# Allegro board Modulo-Rev_03.brd
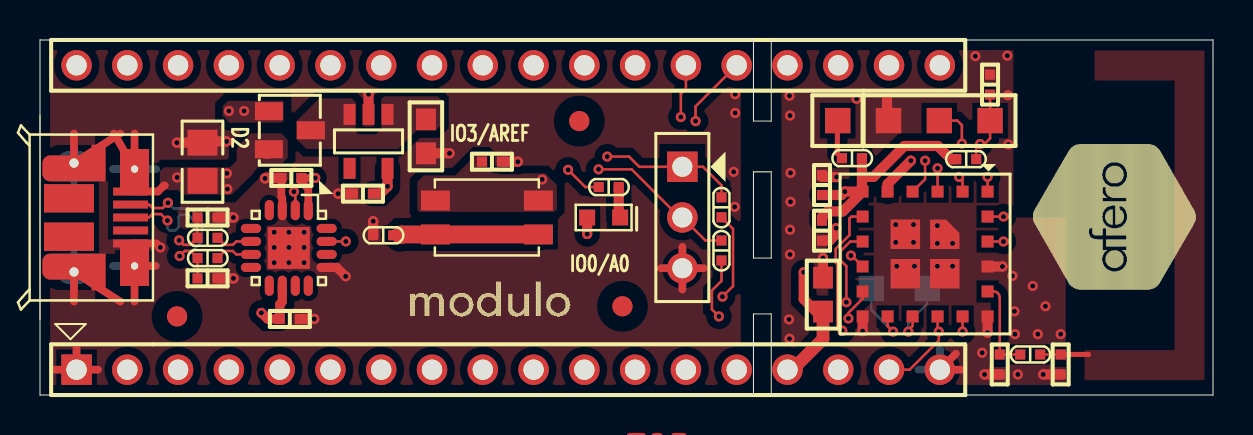
[diagram p0: board, top side]
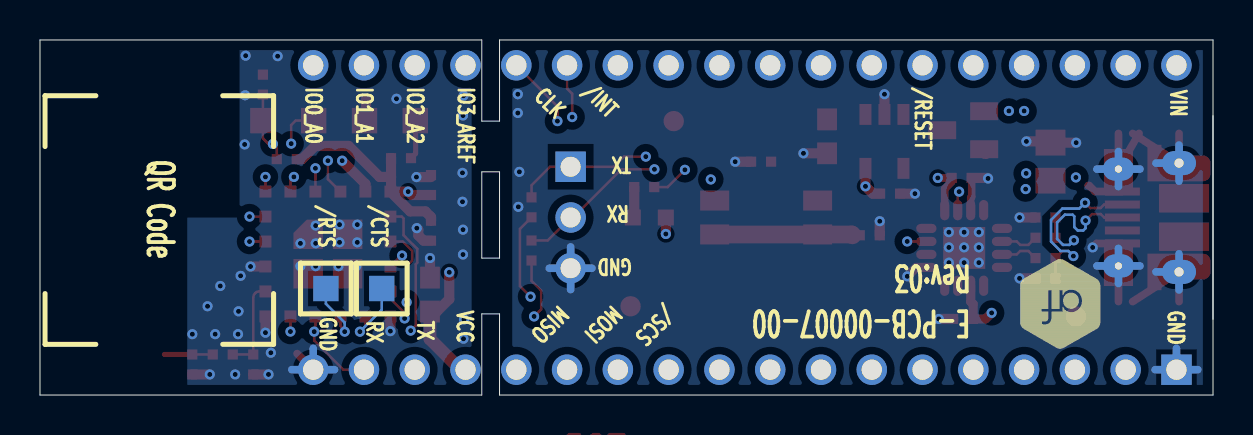
[diagram p1: board, bottom side, seen from below]

Outline 58.67 x 17.78 mm; copper layers: TOP, GND_IN2, PWR_IN3, BOTTOM. Coordinates in mm from the lower left corner of the outline.
Outline path: 0,17.78 0,0 35.69,0 35.69,4.06 36.58,4.06 36.58,0 58.67,0 58.67,17.78 36.58,17.78 36.58,13.72 35.69,13.72 35.69,17.78 0,17.78 ; 35.69,11.18 35.69,6.86 36.58,6.86 36.58,11.18 35.69,11.18

## Design rules (mm)
net group DIFFPAIR0: nets USB_DM USB_DP
net group DIFFPAIR1: nets USB_DM_JACK USB_DP_JACK
nets with their own width: min track width 0.508; nets GND VCC_SIP

## Placement (name value [footprint] x y rotation side)
C1  1uF  [CAP0402]  22.61 11.68 0 top
C2  0.1uF  [CAP0402]  12.57 10.87 180 top
C3  0.1uF  [CAP0402]  12.5 3.81 0 top
C4  4.7uF  [CAP0805]  8.13 11.68 90 top
C5  1uF  [CAP0402]  16.15 10.08 180 top
C6  4.7uF,10V  [CAP0603]  19.3 12.95 270 top
C7  47pF  [CAP0402]  8.38 5.84 0 top
C8  47pF  [CAP0402]  8.38 8.89 0 top
C9  12pF  [CAP0402]  39.12 10.52 90 top
C10  0.1uF  [CAP0402]  39.12 8.23 270 top
C11  22uF  [CAP0603]  39.17 5.03 90 top
C12  1nF  [CAP0402]  47.52 15.54 90 top
D1  615nm Orange  [LED-0603]  28.19 8.89 0 top
D2  BAV70  [SOT23-BAV70]  12.5 13.26 270 top
J1  HEADER 18  [0P1INCH-HDRX18]  1.83 1.27 0 top
J2  HEADER 18  [0P1INCH-HDRX18#2]  45.01 16.51 180 top
J3  USB Micro-B  [FCI-10103594-0001LF]  4.53 8.89 270 top
J4  1/10" HDR  [TE-87224-3]  32.13 11.43 90 top
J6  4PADS  [4X0P1SPACE50MILSQUARE]  39.9 13.74 0 top
L2  4.7nH  [IND0402]  48.01 1.53 90 top
L3  4.7nH  [IND0402]  51.05 1.53 90 top
NOREF  -  [unnamed]  6.86 3.94 0 top
NOREF#2  -  [#2]  59.18 0 90 top
NOREF#3  -  [#2]  36.58 13.72 90 top
NOREF#4  -  [#2]  35.69 6.86 90 top
NOREF#5  -  [#2]  36.58 0 90 top
NOREF#6  -  [#2]  0 17.78 0 top
NOREF#7  -  [unnamed]  29.13 4.45 0 top
NOREF#8  -  [#2]  35.69 6.86 0 top
NOREF#9  -  [unnamed]  26.97 13.72 0 top
R1  300  [RES0402]  28.45 10.41 180 top
R2  100  [RES0402]  17.17 8 180 top
R3  1K  [RES0402]  34.09 9.4 90 top
R4  1K  [RES0402]  34.09 7.24 90 top
R5  27  [RES0402]  8.38 6.86 180 top
R6  27  [RES0402]  8.38 7.87 180 top
R8  0  [RES0402]  49.53 2.03 180 top
R9  10K  [RES0402]  46.33 11.81 0 top
R10  0  [RES0402]  40.61 11.86 180 top
SW1  EVQ-P2202M  [PANA-EVQ-P2202M]  22.35 8.89 0 top
TP1  Tiny TP  [TESTPAD50MILSQ]  41.58 5.33 180 bottom
TP2  Tiny TP  [TESTPAD50MILSQ]  44.37 5.33 180 bottom
U1  FT230X  [FTDI_FT230X]  12.45 7.37 270 top
U2  3.3V,300mA  [TI-TLV70233DBVR]  16.43 12.7 180 top
U3  HACHI  [KIBAN-SIP]  44.27 7.06 180 top

## Library data of the parts
C1-C12 = CAP NP
D1 = LED2P
D2 = BAV70
J1 J2 = HEADER 18
J3 = USB-B-MICRO
J4 = HDR-1x3
J6 = 4PADS
L2 L3 = IND
R1-R6 R9 = RESISTOR
R8 R10 = RES
SW1 = SW PUSHBUTTON 4
TP1 TP2 = Tiny TP
U1 = FTDI FT230X: User Part Number: E-ICS-00053-00; Tolerance: TOLERANCE
U2 = TI-TLV70233DBVR
U3 = HACHI-CUSTOMER

## Footprints (pads in the part's own frame, mm; a bottom-side part is the same pattern mirrored in y, then rotated)
0P1INCH-HDRX18
  rect 1.524x1.524 hole 1.016: 1(0,0)
  round 1.524 hole 1.016: 2(2.54,0) 3(5.08,0) 4(7.62,0) 5(10.16,0) 6(12.7,0) 7(15.24,0) 8(17.78,0) 9(20.32,0) 10(22.86,0) 11(25.4,0) 12(27.94,0) 13(30.48,0) 14(33.02,0) 15(35.56,0) 16(38.1,0) 17(40.64,0) 18(43.18,0)
0P1INCH-HDRX18#2
  round 1.524 hole 1.016: 1(0,0) 2(2.54,0) 3(5.08,0) 4(7.62,0) 5(10.16,0) 6(12.7,0) 7(15.24,0) 8(17.78,0) 9(20.32,0) 10(22.86,0) 11(25.4,0) 12(27.94,0) 13(30.48,0) 14(33.02,0) 15(35.56,0) 16(38.1,0) 17(40.64,0) 18(43.18,0)
4X0P1SPACE50MILSQUARE
  rect 1.27x1.27 smd: 1(0,0) 2(2.54,0) 3(5.08,0) 4(7.62,0)
CAP0402
  rect 0.508x0.508 smd: 1(-0.5,0) 2(0.5,0)
CAP0603
  rect 1.092x0.991 smd: 1(-0.85,0) 2(0.85,0)
CAP0805
  rect 1.295x1.499 smd: 1(-0.953,0) 2(0.953,0)
FCI-10103594-0001LF
  rect 1.425x2.5 smd: (-0.962,-3.084) (0.962,-3.084)
  rect 0.4x1.75 smd: 1(-1.3,-0.001) 2(-0.65,-0.001) 3(0,-0.002) 4(0.65,0) 5(1.3,-0.004)
  custom 2.008x1.454 hole 1.05x0.65: 6(-2.425,0.196) 7(2.425,0.196)
  custom 1.832x3.162 hole 0.7x1.2: 8(-2.725,-2.834)
  custom 1.832x3.163 hole 0.7x1.2: 9(2.725,-2.834)
FTDI_FT230X
  oval 1.016x0.457 smd: 1(-1.892,0.975) 2(-1.892,0.325) 3(-1.892,-0.325) 4(-1.892,-0.975) 9(1.892,-0.975) 10(1.892,-0.325) 11(1.892,0.325) 12(1.892,0.975)
  oval 0.457x1.016 smd: 5(-0.975,-1.892) 6(-0.325,-1.892) 7(0.325,-1.892) 8(0.975,-1.892) 13(0.975,1.892) 14(0.325,1.892) 15(-0.325,1.892) 16(-0.975,1.892)
  rect 2.1x2.1 smd: 17(0,0)
IND0402
  rect 0.508x0.508 smd: 1(-0.5,0) 2(0.5,0)
KIBAN-SIP
  rect 0.6x0.6 smd: 1(-3.125,-3.125) 2(-1.875,-3.125) 3(-0.625,-3.125) 4(0.625,-3.125) 5(1.875,-3.125) 6(3.125,-3.125) 7(3.125,-1.875) 8(3.125,-0.625) 9(3.125,0.625) 10(3.125,1.875) 11(3.125,3.125) 12(1.875,3.125) 13(0.625,3.125) 14(-0.625,3.125) 15(-1.875,3.125) 16(-3.125,3.125) 17(-3.125,1.875) 18(-3.125,0.625) 19(-3.125,-0.625) 20(-3.125,-1.875)
  rect 1.475x1.475 smd: 21(-0.988,0.988) 22(0.988,0.988) 24(0.988,-0.988)
  custom 1.475x1.475 smd: 23(-0.988,-0.988)
LED-0603
  rect 0.8x0.8 smd: 1(-0.825,0) 2(0.825,0)
PANA-EVQ-P2202M
  rect 1.45x1 smd: 1(-2.575,-0.85) 2(-2.575,0.85) 3(2.575,-0.85) 4(2.575,0.85)
RES0402
  rect 0.508x0.508 smd: 1(-0.5,0) 2(0.5,0)
SOT23-BAV70
  rect 0.9x1.4 smd: 1(-0.95,-1.05) 2(0.95,-1.05) 3(0,1.05)
TE-87224-3
  rect 1.524x1.524 hole 1: 1(0,0)
  round 1.524 hole 1: 2(-2.54,0) 3(-5.08,0)
TESTPAD50MILSQ
  rect 1.27x1.27 smd: 1(0,0)
TI-TLV70233DBVR
  rect 0.6x1.05 smd: 1(-0.95,-1.35) 2(0,-1.35) 3(0.95,-1.35) 4(0.95,1.35) 5(-0.95,1.35)
unnamed
  round 1.016 smd: (0,0)

## Nets
GND: C1.2 C2.2 C3.2 C4.2 C5.2 C6.2 C7.2 C8.2 C9.2 C10.2 C11.2 C12.2 J1.1 J1.18 J3.5(GND) J3.6(SH1) J3.7(SH2) J3.8(SH3) J3.9(SH4) J4.3 J6.2 L2.1 L3.1 R2.2 U1.3(GND1) U1.13(GND2) U1.17(GNDPAD) U2.2(GND) U3.11(GND1) U3.16(GND2) U3.18(GND3) U3.21(GND4) U3.22(GND5) U3.23(GND6) U3.24(GND7)
VCC_SIP: C2.1 C5.1 C9.1 C10.1 C11.1 D1.1(A) J1.15 R9.1 R10.1(PIN1) U1.1(VCCIO) U2.5(OUT) U3.6(VCC)
VCC_USB: C3.1 C4.1 D2.2(A2) J3.1(VBUS) U1.10(VCC)
VIN: D2.1(A1) J2.18
ANT_TRACE: L3.2 R8.1(PIN1)
DBG_CLK: J6.3 U3.20(RES3)
HOST_INT_B: J2.6 U3.1(HOST_INT_B)
IO0_A0: J2.1 R1.2 U3.2(IO0/A0)
IO1_A1: J2.2 U3.3(IO1/A1)
IO2_A2: J2.3 U3.4(IO2/A2)
IO3_AREF: C1.1 J2.4 SW1.2 SW1.4 U3.5(IO3/AREF)
RESET_B: C12.1 J2.13 J6.4 R9.2 U3.19(RESET_B)
RF: L2.2 R8.2(PIN2) U3.17(RF ANT OUT)
RX_FTDI: J4.2 R4.2 U1.2(RXD)
SPI_MISO: J1.14 U3.7(SPI_MISO)
SPI_MOSI: J1.13 U3.10(SPI_MOSI)
SPI_SCLK: J2.5 U3.9(SPI_SCLK)
SPI_SCS: J1.12 U3.8(SPI_SCS)
TX_FTDI: J4.1 R3.2 U1.15(TXD)
UART_RX: J1.17 R3.1 U3.14(DBG UART RX)
UART_TX: J1.16 R4.1 U3.15(DBG UART TX)
USB_DM: R5.1 U1.7(USBDM)
USB_DM_JACK: C7.1 J3.2(D-) R5.2
USB_DP: R6.1 U1.6(USBDP)
USB_DP_JACK: C8.1 J3.3(D+) R6.2
N286188: D1.2(C) R1.1
N287525: R2.1 SW1.1 SW1.3
N288985: J6.1 R10.2(PIN2)
N298800: TP1.1 U3.12(RES1)
N298804: TP2.1 U3.13(RES2)
N308551: C6.1 D2.3(CC) U2.1(IN) U2.3(EN)

Pads without a net: J1 2 3 4 5 6 7 8 9 10 11; J2 7 8 9 10 11 12 14 15 16 17; J3 4; U1 4 5 8 9 11 12 14 16; U2 4

## Via types
v1: diameter 0.508, hole 0.254, TOP to BOTTOM, 109 vias

## Routing (per net, layer and track width the routed paths; a pad name or vN(x,y) marks a point on that pad's centre or on a via; arc(x,y) is an arc through that point)
GND: length 96.9
  TOP w0.381: 31.06,6.35 J4.3 ; J4.3 32.13,7.42 ; J4.3 32.13,5.28 ; J4.3 33.2,6.35 ; J3.5 5.82,7.59 v1(6.02,7.39) ; J1.1 1.83,2.34 ; J1.1 0.76,1.27 ; J1.1 2.9,1.27 ; 45.81,2.08 J1.18 46.08,1.27 ; C2.2 12.07,9.92 12.12,9.88 U1.3 ; 4.73,4.68 J3.7 ; J3.7 4.73,7.3 ; J3.7 5.76,6.47 ; 4.02,4.68 J3.9 1.7,4.68 ; 4.73,13.1 J3.6 3.7,13.1 ; 4.02,13.1 J3.8 1.7,13.1
  TOP w0.457: U1.13 14.84,6.39 v1(15.29,5.94)
  TOP w0.508: 42.37,14.83 42.37,14.3 42.44,14.22 J6.2 ; U2.2 v1(16.43,15.06) ; C7.2 v1(9.68,5.84) ; v1(39.83,8.36) 39.75,8.28 39.75,8 39.48,7.73 C10.2 ; v1(6.85,12.64) C4.2 8.19,12.7 v1(9.33,12.7) ; U3.11 41.15,3.2 v1(41.15,3.2) ; C3.2 v1(13.72,3.81) ; C1.2 v1(23.9,11.68) ; C6.2 v1(20.49,12.1) ; L2.1 v1(47.24,1.03) ; U3.18 v1(48.14,6.44) ; C5.2 v1(14.91,10.08) ; C2.2 11.28,10.87 v1(11.25,10.85) ; C8.2 v1(9.68,8.89) ; C11.2 v1(39.17,6.86) ; U3.16 v1(47.4,3.12) ; R2.2 v1(16.67,8.7) ; L3.1 v1(50.18,1.03) ; 39.12,10.91 v1(39.84,10.91)
  GND_IN2 w0.381: J1.1 1.83,2.34 ; J1.1 2.9,1.27 ; J1.1 0.76,1.27 ; 4.73,5.58 J3.7 ; J3.7 5.81,6.47 ; J3.7 3.65,6.47 ; J3.7 4.73,7.35 ; J3.6 5.81,11.31 ; J3.6 4.73,10.43 ; J3.6 4.73,12.2 ; J3.6 3.65,11.31 ; J3.9 1.7,7.07 ; J3.9 1.7,5.26 ; J3.9 2.86,6.17 ; J4.3 32.13,7.42 ; J4.3 33.2,6.35 ; J4.3 32.13,5.28 ; J4.3 31.06,6.35 ; J3.8 2.86,11.61 ; J3.8 1.7,10.71 ; J3.8 1.7,12.52 ; J1.18 45.01,2.34 ; J1.18 46.08,1.27 ; J1.18 43.94,1.27
  BOTTOM w0.381: 32.13,5.28 J4.3 ; J4.3 33.2,6.35 ; J4.3 31.06,6.35 ; J4.3 32.13,7.42 ; J3.7 5.81,6.47 ; J3.7 4.73,7.35 ; J3.7 3.65,6.47 ; J3.7 4.73,5.58 ; J3.8 1.7,12.52 ; J3.8 2.86,11.61 ; J3.8 1.7,10.71 ; 4.73,10.43 J3.6 ; J3.6 4.73,12.2 ; J3.6 5.81,11.31 ; J3.6 3.65,11.31 ; J3.9 2.86,6.17 ; J3.9 1.7,5.26 ; J3.9 1.7,7.07 ; J1.18 46.08,1.27 ; J1.18 45.01,2.34 ; J1.18 43.94,1.27 ; J1.1 1.83,2.34 ; J1.1 0.76,1.27 ; J1.1 2.9,1.27
  vias: v1(11.71,8.15) v1(11.71,7.39) v1(11.71,6.63) v1(12.45,8.15) v1(12.45,7.39) v1(12.45,6.63) v1(13.21,8.15) v1(13.21,7.39) v1(13.21,6.63) v1(34.7,11.18) v1(34.75,9.42) v1(34.77,15.06) v1(34.77,14.12) v1(37.49,14.99) v1(37.52,14) v1(37.54,11.13) v1(37.54,9.68) v1(37.52,8.28) v1(37.52,7.04) v1(37.47,3.78) v1(37.49,2.82) v1(40.84,14.83) v1(42.8,8.53) v1(42.8,7.65) v1(42.85,6.45) v1(43.69,8.53) v1(43.69,7.65) v1(43.74,6.45) v1(44.89,8.48) v1(44.89,7.59) v1(44.89,6.45) v1(45.65,7.59) v1(45.65,6.45) v1(46.79,16.97) v1(47.13,2.12) v1(48.39,16.99) v1(48.41,15.01) v1(48.44,12.55) v1(48.64,5.97) v1(48.74,4.19) v1(48.77,3.05) v1(48.91,1.03) v1(49.66,5.46) v1(49.91,3.05) v1(50.29,4.45) v1(51.05,3.05)
VCC_SIP: length 23.6
  TOP w0.381: U1.1 13.42,10.33 13.07,10.68 C2.1 v1(13.77,10.87)
  TOP w0.508: D1.1 v1(27.37,8.07) ; U3.6 41.11,10.22 41.11,10.92 ; U3.6 40.16,9.19 39.4,9.19 39.12,8.92 C10.1 ; U3.6 v1(40.26,10.19) 40.09,10.02 C9.1 ; v1(38.2,6.15) 38.2,4.8 38.82,4.18 C11.1 ; 41.11,10.92 R10.1 ; 41.11,10.92 41.69,10.92 43.23,12.47 44.91,12.47 45.57,11.81 R9.1 ; U2.5 v1(17.38,10.45) 17.02,10.08 C5.1
  TOP w0.635: J1.15 37.63,1.27 39.17,2.81 C11.1
VCC_USB: length 4.8
  TOP w0.381: 6.25,10.49 6.2,10.49 5.9,10.19 J3.1
  TOP w0.457: v1(11.07,4.11) 11.38,3.81 C3.1 12,4.55 12.12,4.68 U1.10
  TOP w0.762: 11.45,12.26 11.41,12.22 11.36,12.22 D2.2
  vias: v1(6.86,10.9) v1(9.35,11.1) v1(9.37,10.31)
VIN: length 2.1
  PWR_IN3 w0.381: 2.9,16.51 J2.18 1.83,15.44
  vias: v1(9.45,14.22) v1(10.21,14.22)
ANT_TRACE: length 1
  TOP w0.127: R8.1 L3.2
DBG_CLK: length 8.9
  TOP w0.127: v1(46.11,12.59) 46.11,13.52 45.89,13.74 J6.3 ; U3.20 v1(48.19,8.94)
  PWR_IN3 w0.127: v1(46.11,12.59) 46.6,13.08 47.24,13.08 48.29,12.04 48.29,9.52 48.19,9.43 v1(48.19,8.94)
HOST_INT_B: length 21.4
  TOP w0.127: v1(32.05,13.92) 32.05,15.09 32.31,15.34 J2.6 ; U3.1 v1(47.4,10.92)
  PWR_IN3 w0.127: v1(47.4,10.92) 46.66,10.19 43.54,10.19 41.3,12.42 34.01,12.42 33.25,13.18 33.25,14 33.02,14.22 32.36,14.22 v1(32.05,13.92)
IO0_A0: length 31.9
  TOP w0.127: U3.2 46.15,10.75 v1(45.97,10.92) ; R1.2 27.28,10.41 v1(26.42,11.28)
  PWR_IN3 w0.127: v1(26.42,11.28) 29.92,14.78 33.27,14.78 33.78,14.27 33.78,13.54 34.39,12.93 41.66,12.93 43.81,10.77 45.82,10.77 v1(45.97,10.92) 45.59,11.3 45.59,15.93 J2.1
IO1_A1: length 7.3
  TOP w0.127: U3.3 v1(44.9,11.35)
  PWR_IN3 w0.127: J2.2 44.9,14.08 v1(44.9,11.35)
IO2_A2: length 9
  TOP w0.127: v1(44.27,11.73) 44.27,10.81 U3.4
  PWR_IN3 w0.127: J2.3 40.96,16.51 44.27,13.2 v1(44.27,11.73)
IO3_AREF: length 28.1
  TOP w0.508: U3.5 42.4,10.57 v1(43.56,11.73)
  PWR_IN3 w0.381: J2.4 38.91,14.99 38.91,13.41 38.99,13.34 ; 38.99,13.34 38.96,13.31 34.62,13.31 34.16,13.77 34.16,14.48 33.38,15.27 29.59,15.27 v1(25.12,10.79) ; 38.99,13.34 41.96,13.34 v1(43.56,11.73)
Net_4: length 1.3
  TOP w0.254: 52.45,2.03 51.18,2.03
RESET_B: length 51.6
  TOP w0.127: R9.2 46.83,12.37 v1(47.03,12.57) 47.24,12.57 47.52,12.85 J6.4 C12.1 ; U3.19 v1(48.19,7.69)
  PWR_IN3 w0.127: J2.13 14.53,15.48 16.55,13.46 20.04,13.46 23.22,10.29 26.37,10.29 27.13,11.05 27.13,11.58 30.05,14.5 33.15,14.5 33.53,14.12 33.53,13.34 34.19,12.67 41.5,12.67 43.71,10.46 46.2,10.46 46.58,10.85 46.58,12.13 v1(47.03,12.57) 47.17,12.57 47.98,11.76 47.98,9.88 47.68,9.58 47.68,8.2 v1(48.19,7.69)
RF: length 4.7
  TOP w0.127: U3.17 47.73,5.19 arc(47.82,5.17) 47.89,5.12 47.92,5.09 arc(47.98,4.99) 48.01,4.88 L2.2 R8.2
RX_FTDI: length 27.5
  TOP w0.127: v1(27.94,11.3) 29.59,11.3 32,8.89 J4.2 33.28,7.74 R4.2 ; U1.2 12.77,10.11 v1(12.7,10.19)
  PWR_IN3 w0.127: v1(12.7,10.19) 12.7,11.58 13.06,11.94 18.95,11.94 21.44,9.45 26.67,9.45 27.94,10.72 v1(27.94,11.3)
SPI_MISO: length 15.3
  TOP w0.127: v1(40.13,3.23) 39.88,3.48 39.88,6.55 39.8,6.63 39.8,7.32 40.49,8 40.49,8.84 40.58,8.94 U3.7
  PWR_IN3 w0.127: J1.14 34.85,2.3 34.96,2.41 34.96,4 35.39,4.42 38.94,4.42 v1(40.13,3.23)
SPI_MOSI: length 12.1
  TOP w0.127: v1(40.44,3.84) 40.44,4.11 41.15,4.83 U3.10
  PWR_IN3 w0.127: v1(40.44,3.84) 39.94,3.84 39.1,4.67 35.28,4.67 34.71,4.1 34.71,3.16 33.54,2 33.04,2 J1.13
SPI_SCLK: length 20
  TOP w0.127: U3.9 40.65,6.93 40.61,6.93 v1(40.56,6.99) ; J2.5 32.79,14.45 v1(32.79,13.72)
  PWR_IN3 w0.127: v1(40.56,6.99) 41.06,6.99 41.86,7.79 41.86,11.35 41.05,12.17 33.85,12.17 32.79,13.22 v1(32.79,13.72)
SPI_SCS: length 16.6
  TOP w0.127: U3.8 40.53,7.69 40.06,7.21 40.06,6.73 40.34,6.46 v1(40.34,4.65)
  PWR_IN3 w0.127: v1(40.34,4.65) 39.81,4.65 39.54,4.93 35.18,4.93 34.46,4.21 34.46,3.54 33.26,2.35 30.85,2.35 J1.12
TX_FTDI: length 32.9
  TOP w0.127: U1.15 v1(15.3,7.69) ; R3.2 34.09,10.5 33.16,11.43 J4.1 29.97,11.43 29.46,11.94 v1(28.37,11.94)
  PWR_IN3 w0.127: v1(28.37,11.94) 27.88,11.94 27.48,11.54 27.48,10.92 26.29,9.73 21.74,9.73 19.25,12.22 12.7,12.22 11.99,11.51 11.99,9.53 12.34,9.17 13.82,9.17 v1(15.3,7.69)
UART_RX: length 20.8
  TOP w0.127: U3.14 44.9,3.24 v1(44.96,3.17) 44.96,2.73 43.5,1.27 J1.17 ; R3.1 34.67,8.32 34.67,5.46 v1(34.14,4.93)
  PWR_IN3 w0.127: v1(44.96,3.17) 44.61,3.53 44.6,3.53 42.53,5.59 40.01,5.59 39.85,5.44 34.65,5.44 v1(34.14,4.93)
UART_TX: length 21.8
  TOP w0.127: U3.15 v1(46.15,3.18) ; R4.1 34.09,5.71 33.61,5.24 33.61,4.29 v1(33.96,3.94)
  PWR_IN3 w0.127: v1(33.96,3.94) 33.96,4.07 35.07,5.18 39.98,5.18 40.13,5.33 41.07,5.33 41.83,4.57 41.83,2.54 ; 41.83,2.54 41.2,2.54 J1.16 ; 41.83,2.54 45.51,2.54 v1(46.15,3.18)
USB_DM: length 1.9
  TOP w0.127: U1.7 9.82,7.04 9.64,7.21 9.24,7.21 R5.1
USB_DM_JACK: length 8.8
  TOP w0.127: J3.2 5.45,9.54 5.62,9.37 5.82,9.37 5.94,9.37 6.14,9.37 v1(6.4,9.63) ; v1(6.99,6.96) 7.24,7.21 7.53,7.21 R5.2 C7.1
  BOTTOM w0.127: v1(6.99,6.96) 7.24,7.21 7.62,7.21 8.1,7.69 8.1,8.77 7.54,9.33 6.69,9.33 v1(6.4,9.63)
USB_DP: length 1.9
  TOP w0.127: R6.1 9.24,7.52 9.64,7.52 9.82,7.69 U1.6
USB_DP_JACK: length 8.8
  TOP w0.127: C8.1 R6.2 7.53,7.52 7.19,7.52 v1(6.96,7.75) ; J3.3 5.44,8.89 5.62,9.06 5.82,9.06 5.94,9.06 6.05,9.06 v1(6.38,8.74)
  BOTTOM w0.127: v1(6.38,8.74) 6.38,8.74 6.38,8.35 6.49,8.24 6.77,8.24 6.94,8.41 6.94,8.94 7.02,9.03 7.41,9.03 7.8,8.64 7.8,7.82 7.5,7.52 7.19,7.52 v1(6.96,7.75)
N286188: length 1.6
  TOP w0.508: D1.2 28.95,8.96 R1.1
N287525: length 7.3
  TOP w0.457: 18.03,8 R2.1
  TOP w0.889: 18.03,8 18.07,8.04 SW1.1 SW1.3
N288985: length 2
  TOP w0.254: J6.1 39.89,13.72 39.89,12.09 R10.2
N298800: length 3.5
  TOP w0.127: U3.12 42.4,3.45 v1(42.67,3.17)
  BOTTOM w0.127: v1(42.67,3.17) 41.58,4.27 TP1.1
N298804: length 3.4
  TOP w0.127: v1(43.43,3.17) 43.43,3.25 43.65,3.46 U3.13
  BOTTOM w0.127: TP2.1 44.37,4.57 43.43,3.63 v1(43.43,3.17)

## Copper pours and planes (outline as drawn; the poured copper is in the pictures)
GND on TOP: 37.08,17.27 48.69,17.27 48.69,8.89 51.31,8.89 51.31,0.51 37.08,0.51
GND on TOP: 0.51,17.27 34.92,17.27 35.05,17.14 35.05,0.51 0.51,0.51 ; 3 cut-outs
GND on BOTTOM: 0.51,0.51 0.51,17.27 35.05,17.27 35.05,6.58 35.33,6.58 35.33,6.73 35.46,6.73 35.46,11.51 36.96,11.51 36.96,4.62 37.08,4.62 37.08,17.27 48.69,17.27 48.69,8.89 51.31,8.89 51.31,0.51 37.08,0.51 37.08,4.57 36.96,4.57 36.96,6.55 35.05,6.55 35.05,0.51
GND on GND_IN2: 35.05,0.51 35.05,4.57 37.08,4.57 37.08,0.51 51.31,0.51 51.31,8.89 48.69,8.89 48.69,17.27 37.08,17.27 37.08,13.21 35.05,13.21 35.05,17.27 0.51,17.27 0.51,0.51
VCC_SIP on PWR_IN3: 13.26,11.56 18.72,11.56 21.13,9.14 26.59,9.14 31.04,13.59 32.21,13.59 32.89,12.9 33.76,12.9 34.59,12.06 40.06,12.06 40.56,11.56 40.56,9.78 39.42,8.64 39.42,7.49 39.41,7.48 39.41,6.72 38.15,5.46 34.59,5.46 31.67,2.54 21.13,2.54 14.15,9.53 13.39,9.53 13.13,9.78 13.13,11.43
VCC_USB on TOP: 7.14,10.03 9.6,10.03 11.15,11.58 12.09,11.58 12.4,11.89 12.4,12.78 12.06,13.11 10.54,13.11 9.83,12.4 9.83,11.73 9.5,11.4 6.2,11.4 5.99,11.2 5.99,10.34 6.07,10.26 6.91,10.26
VCC_USB on PWR_IN3: 1.07,11.76 11.05,11.76 11.43,11.38 11.43,8.94 11.38,8.89 11.53,8.74 13.79,8.74 14.48,8.05 14.48,1.8 13.92,1.24 1.52,1.24 1.02,1.75 1.02,11.46 1.07,11.51
VIN on TOP: 12.19,13.74 12.19,14.73 9.4,14.73 9.14,14.48 9.14,13.97 9.47,13.64 12.09,13.64
VIN on PWR_IN3: 0.81,17.27 11.48,17.27 12.5,16.26 12.5,13.46 11.48,12.45 0.81,12.45
IO3_AREF on TOP: 22.33,12.04 21.82,12.04 20.78,11 19.2,11 18.87,10.67 18.87,9.25 18.95,9.17 25.73,9.17 25.86,9.3 25.86,10.52 25.27,11.1 22.63,11.1 22.38,11.35 22.38,11.99
Net_4 on TOP: 52.25,0.75 58.25,0.75 58.25,17.25 52.75,17.25 52.75,15.75 56.75,15.75 56.75,2.25 52.25,2.25
N308551 on TOP: 13.97,14.86 15.6,14.86 15.8,14.66 15.8,13.18 15.93,13.06 16.81,13.06 17.07,13.31 17.07,14.81 17.22,14.96 19.89,14.96 20.07,14.78 20.07,13.51 19.81,13.26 18.85,13.26 17.91,12.32 13.34,12.32 12.83,12.83 12.83,13.72

## Text on the board
BOTTOM: BOTTOM
Ref Des/Silkscreen Bottom: /INT | CLK | VIN | GND | /RESET | IO3_AREF | VCC | TX | IO2_A2 | /CTS | RX | IO1_A1 | /RTS | IO0_A0 | /SCS | MOSI | MISO | QR Code | Rev:03 | E-PCB-00007-00
TOP: TOP
Ref Des/Silkscreen Top: IO3/AREF | IO0/A0
GND_IN2: GND1_IN2
PAGE_OUTLINE: FMATE 1-95 | SIZE | SCALE | FILE NAME: | INDEX DATE | JOB# 68266 | SHEET | OF | D | CAGE CODE | CHIBI | KIBAN LABS | REV | NO. | 1 | NEXT ASSEMBLY | PROJECT MGR. | SUPERVISOR | REQUESTOR | DATE | DWG. NO. | DRAWN | CHECKED | DESIGN | STRESS | MATERIAL | Q.A. | SH. | C | B | A | 8 | 7 | 6 | 5 | 4 | 3 | 2 | DESCRIPTION | REVISIONS | APPROVAL | NOTES: UNLESS OTHERWISE SPECIFIED
DIMENSION: CUT OUT | UNIT:INCH
DISPLAY_TOP: FAB_DWG | 14. No metal under the antenna. | 15. No vendor logo | 10. Finish: | 11. Date code and UL rating shall be permanently marked or etched on PCB | 12. Remove non-functional pad in inner layers and planes. | 13. Impedance control: | 1. Materials: FR4 | 5. Front to back pattern shall register within .005 | 6. Layer to layer(pattern to pattern) registration to be +/-.005 | 7. Soldermask: Both sides of board, Liquid Photo Imageable, soldermask | 9. Silkscreen color: White | FAB NOTES: | 2. Components on the top layer. | 3. Minimum signal trace width/spacing:5/7 mils | 4. Drilling | 8. Warpage and twist to meet IPC class II | see cross section for board thickness, copper | 4.1  Minimum hole size is 10 mils | 4.2  All plated holes are to be plated thru and with min .001 thick | 4.3  All hole diameters are finished sizes | 4.4  All holes to be +/-0.003 from true position unless | 4.5  NC drill file has been supplied, see hole size table. | over bare copper (SMOBC),  PMS Warm Grey 5 | weight and layer structures. | 10.1  Edge to be free of loose sliver and rough edge | 10.2  Finished board shall not have nicks scratches, voids, | 10.3  Trace width tol=+/-.001 of finished trace width | 10.4  Board finished with immersion gold(minimum 3 microinches). | 5 mil trace width on top layer control in 50ohm +/-5%. | 5/7 mils width/gap on top and bottom layers  should be controlled 90 ohms +/- 10% . | otherwise specified for PTH, or +/-0.002 if it's NPTH | exposed copper, poor plating or misdrilled holes | 1. NO COPPER THIEVING ALL LAYERS | 2. APPLY SOLDERMASK OVER BARE COPPER, BOTH SIDES. GREEN SOLDERMASK | 3. PLATE 2-5 MICRO INCHES IMMERSION GOLD. | 4. MATERIAL : FR.4 | 5. THICKNESS BOARD WILL BE 0.031 +/- 0.003 IN
User.7: LAYER 1 | LAYER 3 | LAYER 2 | LAYER 4 | (BOTTOM) | (PWR) | (TOP) | (GND) | 4-Layers Stack Up | 0.70 mils | 4.00 mils | 47.00 mils | 1.80 mils | 0.5oz + plating | 0.5oz | Overall thickness:62 mils +/- 10%
User.10: ASSY_BOT
User.11: ASSY_TOP
User.14: PMASK_BOT
User.15: PMASK_TOP
User.16: PWR_IN3
User.17: SIG1_IN3
User.19: SILK_BOT
User.20: SILK_TOP
User.21: SMASK_BOT
User.22: SMASK_TOP
User.30: FIGURE | SIZE | 10.0 | 39.37 | 40.0 | 41.339x25.591 | 47.244x27.559 | FINISHED HOLE CHART | ALL UNITS ARE IN MILS | TOLERANCE | +3.0/-3.0 | +5.0/-5.0 | PLATED | QTY | 109 | 3 | 36 | 2
User.32: LAYER 5 | LAYER 6 | LAYER 3 | LAYER 4 | LAYER 1 | LAYER 2 | LAYER STACKUP | L5_PWR | L3_SIG | BOTTOM | L4_GND | L2_GND | TOP | VIAS FILLED REQUIRED
